# Altium PCB PCB1.PcbDoc
Units mm, origin at the board's own origin, x right, y up, seen from the top; angles counter-clockwise.
Board outline 40 x 20 mm, 2 copper layers (Top Layer, Bottom Layer); 19 components, 18 nets, 76 pads, 19 vias.
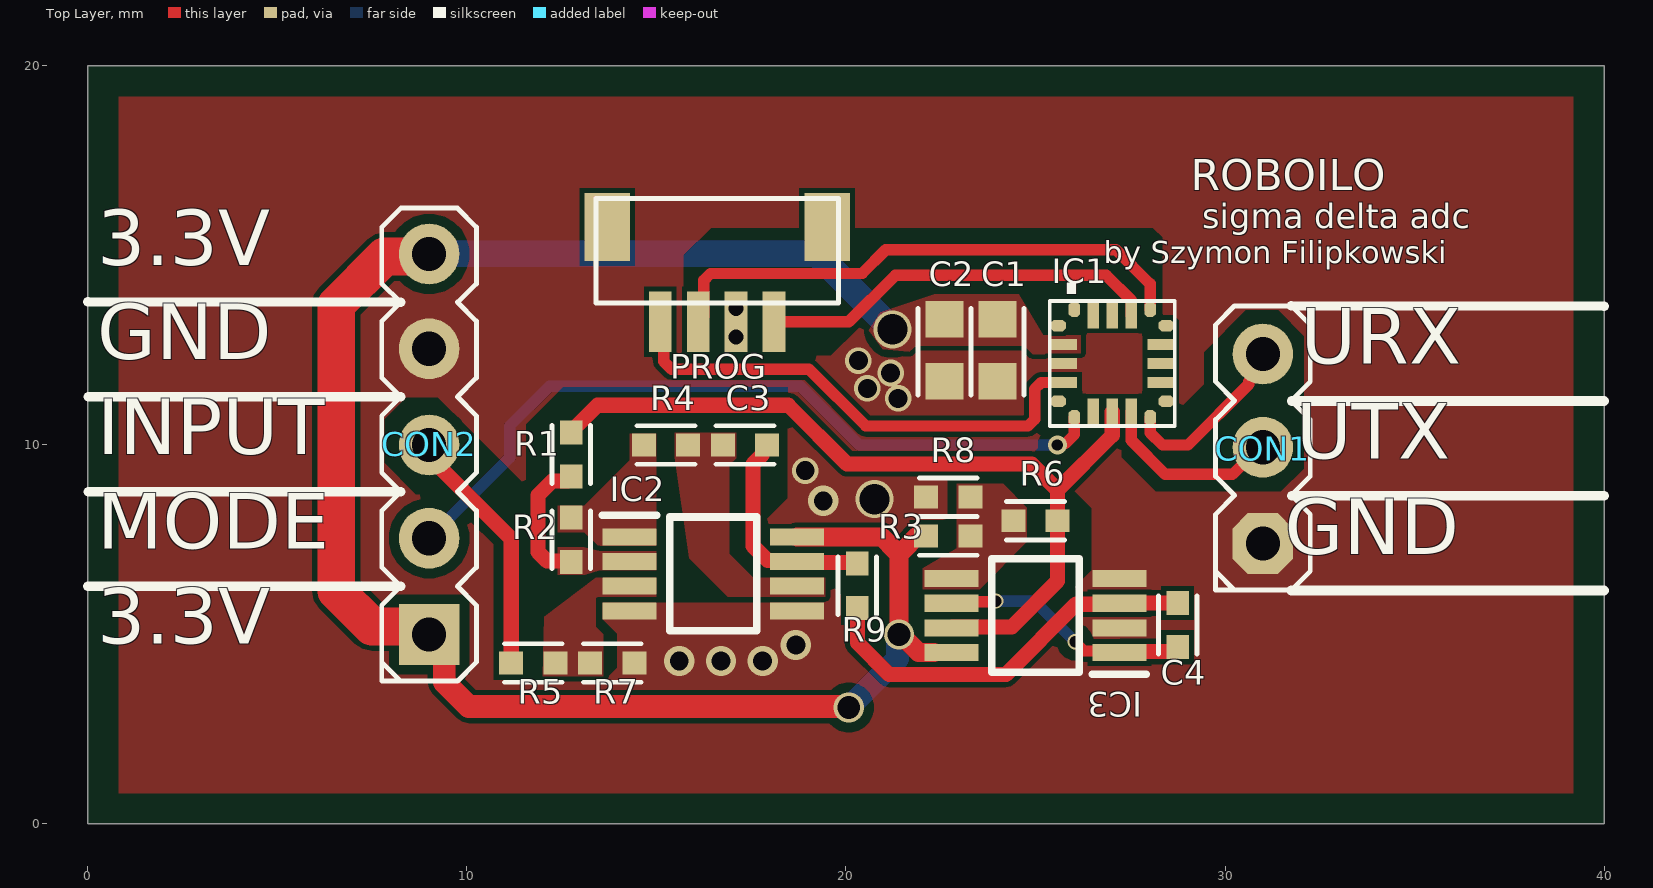
[diagram p0: Top Layer view]
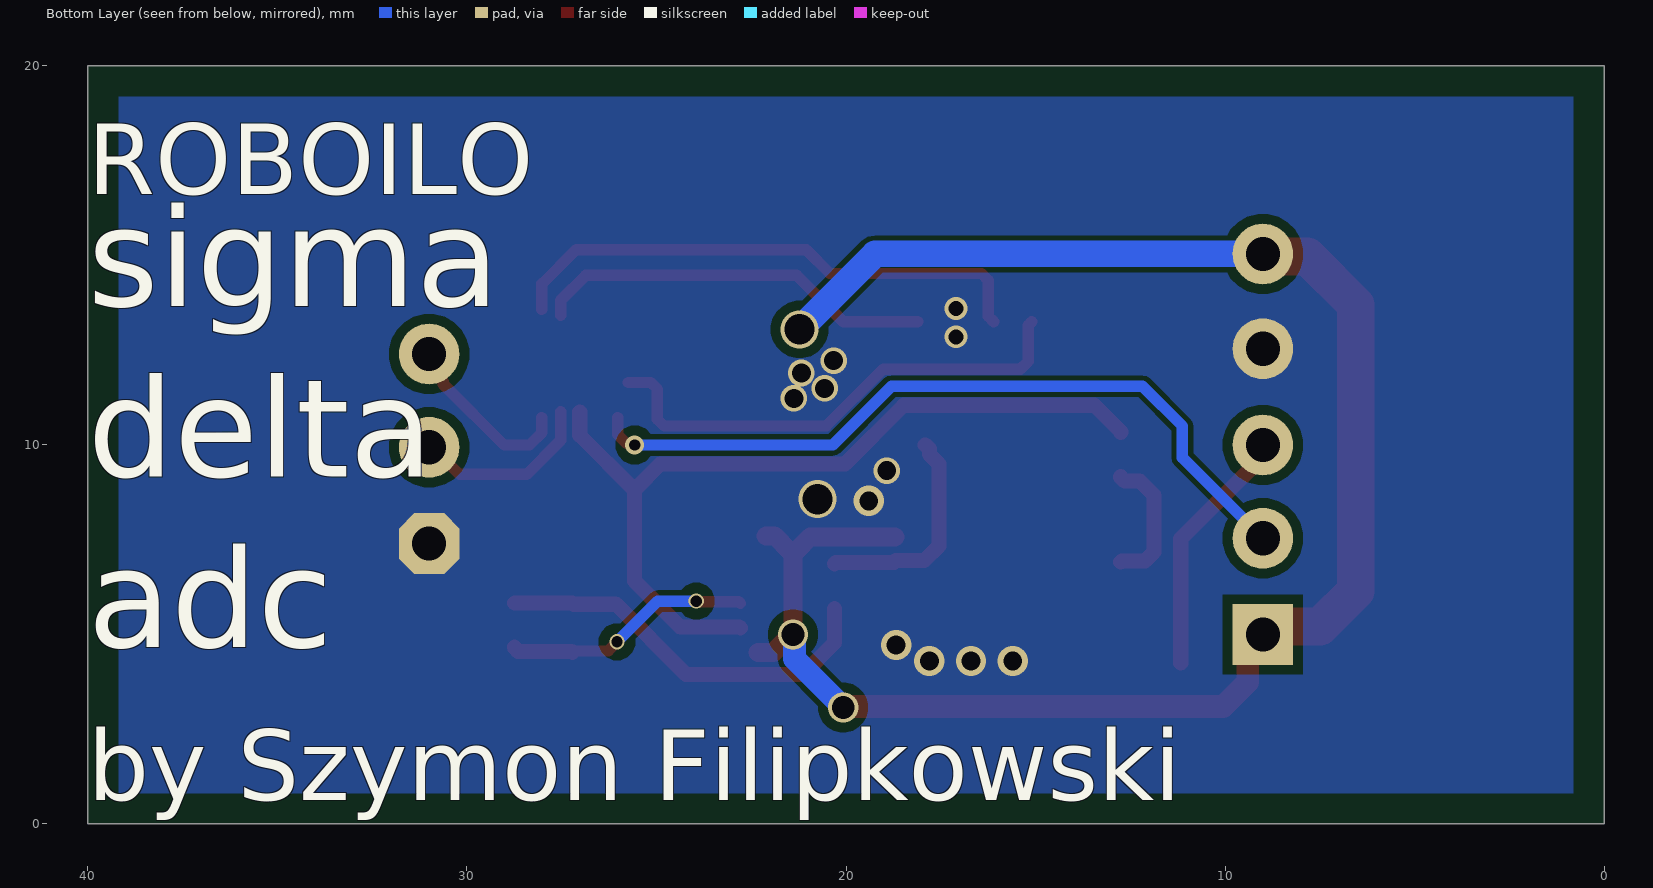
[diagram p1: Bottom Layer view, seen from below]
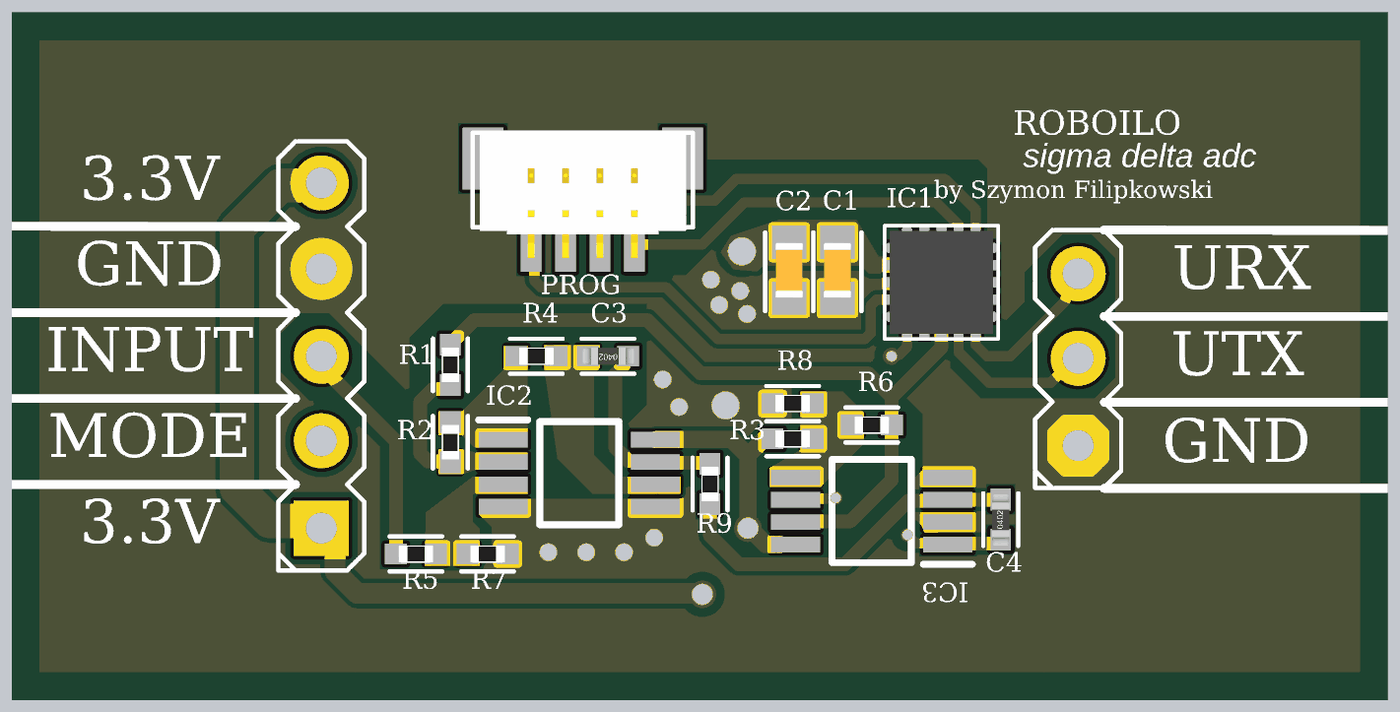
[diagram p2: 3D render of the assembled board from above, using the file's embedded part models]

## Layer stack, top to bottom
Top Solder: solder mask 0.0102, Solder Resist, Dk 3.5
Top Layer: signal copper 0.0356
Dielectric 1: dielectric 0.32, FR-4, Dk 4.8
Bottom Layer: signal copper 0.0356
Bottom Solder: solder mask 0.0102, Solder Resist, Dk 3.5

## Board outline
0,0 40,0 40,20 0,20

## Design rules (kind name [scope] priority, off if disabled: settings)
BoardOutlineClearance [All] p1: gap=0.8 ignorepadtopadclearanceinfootprint=FALSE
Clearance [All] p1: gap=0.127 ignorepadtopadclearanceinfootprint=TRUE except(0.2: Arc-THPad Track-THPad SMDPad-THPad; 0.254: THPad-Fill THPad-Poly THPad-Region Via-Fill Via-Poly Via-Region; 0.33: Arc-Hole Track-Hole SMDPad-Hole THPad-Hole Via-Hole Fill-Hole Poly-Hole Region-Hole; 0.5: THPad-THPad)
HoleSize [All] p1: absolutevalues=TRUE maxlimit=4 minlimit=0.02 maxpercent=80.000 minpercent=20.000
HoleToHoleClearance [All] p1: gap=0.127 allowstackedmicrovias=TRUE
PlaneClearance [All] p1: clearance=0.3
PlaneConnect PlaneConnect_1 [(HasFootprint('R 2512'))] p1: planeconnectstyle=Relief reliefexpansion=0.508 reliefentries=4 reliefconductorwidth=0.254 reliefairgap=0.254
PlaneConnect [All] p2: planeconnectstyle=Relief reliefexpansion=0.508 reliefentries=4 reliefconductorwidth=0.254 reliefairgap=0.254
PolygonConnect "Polygon Power Connection" [(HasFootprint('DFN 5x6')) OR  (HasFootprint('R 2512')) OR  IsVia OR  HasFootprint('SMD PAD')  OR  (HasFootprint('DJNR60454R5FERROCORE'))  OR  (HasFootprint ('SON50P200X200X80-9N-D')) OR (HasFootprint('SOT230P700X180-4N'))  OR    InNetClass('Power')] p1: connectstyle=Direct reliefconductorwidth=0.254 reliefentries=4 polygonreliefangle="90 Angle" airgapwidth=0.254 // Conection to high power components
PolygonConnect [All] p2: connectstyle=Direct reliefconductorwidth=0.254 reliefentries=4 polygonreliefangle="90 Angle" airgapwidth=0.254
RoutingVias [All] p1: holewidth=0.3 width=0.5 viastyle="Through Hole" minholewidth=0.2 minwidth=0.3 maxholewidth=1 maxwidth=1.27
SilkToSilkClearance [All] p1: silktosilkclearance=0.127
SolderMaskExpansion "Tented Vias" [IsVia] p1: expansion=0.102 istentingtop=TRUE
SolderMaskExpansion [All] p2: expansion=0.102 istentingtop=FALSE
Width [All] p1: maxlimit=1 minlimit=0.127 preferedwidth=0.3 minimp=50.000000 maximp=50.000000 favimp=50.000000
25 further rules are at their usual default settings.

## Classes and differential pairs
component class main: C1 C2 CON1 CON2 IC1 PROG
component class adc: C3 C4 IC2 IC3 R1 R2 R3 R4 R5 R6 R7 R8 R9

## Components (designator, comment, footprint, x,y, rotation, side; value= is the part's Value field where it differs from the comment)
C1 "100nF" "C 0603" 24,12.5 r270 top
C2 "4.7uF" "C 0603" 22.6,12.5 r270 top
C3 "100nF" "C 0402" 17.334,10 r180 top locked
C4 "100nF" "C 0402" 28.75,5.25 r90 top locked
CON1 "3 Pin" "Goldpin 2.54MM 3P" 31,9.94 r90 top
CON2 "5 PIN" "Goldpin 2.54mm 5P" 9,10 r90 top locked
IC1 "STM32C011F4U6TR" "UFQFPN20 - byMe" 25.375,10.5 r0 top
IC2 "TLV2462CDGKR" SOP65P490X110-8N 16.5,6.6 r0 top locked
IC3 "TLV2462CDGKR" SOP65P490X110-8N 25,5.5 r180 top locked
PROG "4 PIN" BM04B-SRSS-TB 16.6,14.75 r0 top locked
R1 "10k" "R 0402" 12.75,9.75 r90 top locked
R2 "10k" "R 0402" 12.75,7.5 r270 top
R3 "100k" "R 0402" 22.7,7.6 r0 top
R4 "2k1" "R 0402" 15.25,10 r180 top locked
R5 "100k" "R 0402" 11.75,4.25 r180 top locked
R6 "100k" "R 0402" 25,8 r0 top locked
R7 "100k" "R 0402" 13.834,4.25 r0 top locked
R8 "100k" "R 0402" 22.7,8.625 r180 top
R9 "2k1" "R 0402" 20.3,6.284 r90 top

## Footprints (in the part's own frame and the unit in brackets; to place one, negate y for a bottom-side part, rotate by r counter-clockwise, add the part's x,y. Pads: shape width x height; smd on the part's side, far side on the other; paste and mask are expansions set on the pad)
BM04B-SRSS-TB [mm]
  rect 0.6x1.6 smd: 1(-1.5,-1.5) 2(-0.5,-1.5) 3(0.5,-1.5) 4(1.5,-1.5)
  rect 1.2x1.8 smd: A(-2.9,1) B(2.9,1)
  silkscreen extent -3.2,-1 3.2,1.75, body extent -3,-1.9 3,1.7, height 4.25
"C 0402" [mm] "MLCC Capacitor 0402"
  rect 0.635x0.6 smd: 1(-0.584,0) 2(0.584,0)
  silkscreen extent -0.76,-0.51 0.76,0.51, body extent -0.76,-0.25 0.74,0.25, height 0.35
"C 0603" [mil]
  rect 38x39.37 smd: 1(-32,0) 2(32,0)
  silkscreen extent -43,-28 47,28, body extent -31,-16 31,16, height 24
"Goldpin 2.54MM 3P" [mm]
  oct 1.6x1.6 hole 0.9: 1(-2.54,0)
  round 1.6 hole 0.9: 2(0,0) 3(2.46,0)
  silkscreen extent -3.77,-1.25 3.73,1.25
"Goldpin 2.54mm 5P" [mm]
  rect 1.6x1.6 hole 0.9: 1(-5,0)
  round 1.6 hole 0.9: 2(-2.46,0) 3(0,0) 4(2.54,0) 5(5.04,0)
  silkscreen extent -6.23,-1.25 6.25,1.25
"R 0402" [mm] "0402 resistor Chip"
  rect 0.635x0.6 smd: 1(-0.584,0) 2(0.584,0)
  silkscreen extent -0.76,-0.51 0.76,0.51, body extent -0.5,-0.25 0.5,0.25, height 0.31
SOP65P490X110-8N [mm]
  rect 1.425x0.45 smd: 1(-2.212,0.975) 2(-2.212,0.325) 3(-2.212,-0.325) 4(-2.212,-0.975) 5(2.212,-0.975) 6(2.212,-0.325) 7(2.212,0.325) 8(2.212,0.975)
  silkscreen extent -2.93,-1.5 1.15,1.55, body extent -2.45,-1.5 2.45,1.5, height 1.1
"UFQFPN20 - byMe" [mm]
  oct 0.4x0.3 smd: 1(0.225,2.65) 5(0.225,0.65) 11(3.075,0.65) 15(3.075,2.65)
  rect 0.7x0.3 smd: 2(0.375,2.15) 3(0.375,1.65) 4(0.375,1.15) 12(2.925,1.15) 13(2.925,1.65) 14(2.925,2.15)
  oct 0.3x0.4 smd: 6(0.65,0.225) 10(2.65,0.225) 16(2.65,3.075) 20(0.65,3.075)
  rect 0.3x0.7 smd: 7(1.15,0.375) 8(1.65,0.375) 9(2.15,0.375) 17(2.15,2.925) 18(1.65,2.925) 19(1.15,2.925)
  silkscreen extent 0,0 3.3,3.3, body extent 0.14,0.14 3.16,3.16, height 0.55

## Part data
C1 C2 C3 C4: library part Capacitor, "MLCC Capacitor"
IC2 IC3: "Integrated Circuit", Manufacturer_Name="Texas Instruments", Mouser Part Number=595-TLV2462CDGKR, Arrow Part Number=TLV2462CDGKR, Arrow Price/Stock=https://www.arrow.com/en/products/tlv2462cdgkr/texas-instruments?region=nac, Datasheet Link=http://www.ti.com/lit/gpn/TLV2462, Height=1.1mm, Manufacturer_Part_Number=TLV2462CDGKR, Mouser Price/Stock=https://www.mouser.co.uk/ProductDetail/Texas-Instruments/TLV2462CDGKR?qs=Fg5TsMy7H4uE1B0PPHeSQQ%3D%3D
R1 R2 R3 R4 R5 R6 R7 R8 R9: library part Resistor, "General pourpouse resistor"
IC1: ComponentLink1Description=Datasheet, ComponentLink1URL=https://www.alldatasheet.com/datasheet-pdf/download/1583958/STMICROELECTRONICS/STM32C011F4U6TR.html

## Via types
v1: diameter 0.7, hole 0.5, Top Layer to Bottom Layer, tented both sides, 5 vias
v2: diameter 0.8, hole 0.5, Top Layer to Bottom Layer, tented both sides, 5 vias
v3: diameter 0.6, hole 0.4, Top Layer to Bottom Layer, 2 vias
v4: diameter 1, hole 0.8, Top Layer to Bottom Layer, tented both sides, 2 vias
v5: diameter 0.8, hole 0.6, Top Layer to Bottom Layer, tented both sides, 2 vias
v6: diameter 0.4, hole 0.3, Top Layer to Bottom Layer, 2 vias
v7: diameter 0.5, hole 0.3, Top Layer to Bottom Layer, tented both sides, 1 vias

## Nets (pads, with @x,y where several pads share a name; then routed paths per layer and width w, separated by ;. In a path a pad name is that pad's centre, name@x,y a point inside that pad or via, vN(x,y) a via of type N, cw(c..) or ccw(c..) an arc to the next point about the centre after c; other vN are vias at no path point)
3.3V: C1.1 C2.1 CON2.1 CON2.5 IC1.2 IC2.8 IC3.8 R3.1 | length 48.4
  Top Layer w0.5: IC2.8 20.944,7.575 21.319,7.2 21.4,7.2 ; R3.1 21.881,7.6 21.481,7.2 21.4,7.2 ; IC3.8@22.326,4.525 21.918,4.525 21.443,5 v5(21.4,5) 21.4,7.2
  Top Layer w0.6: CON2.1 9.4,4.6 9.4,3.749 10.049,3.1 20.05,3.1 v5(20.075,3.075)
  Top Layer w1: CON2.1 8.789,5.211 7.489,5.211 6.55,6.15 6.55,13.7 7.819,14.969 8.929,14.969 CON2.5
  Bottom Layer w0.6: v5(20.075,3.075) 21.362,4.362 v5@21.362,4.962
  Bottom Layer w0.7: CON2.5 19.235,15.04 v4(21.225,13.05)
A_NEG_IN_1: IC2.2 R1.1 R2.2 | length 3.6
  Top Layer w0.4: R2.2 12.725,6.941 12.109,6.941 11.875,7.175 11.875,8.675 12.248,9.048 12.65,9.048 12.75,9.148 R1.1
A_NEG_IN_2: C3.2 IC2.6 R4.1
A_OUT_1: IC2.1 R2.1 R4.2
A_OUT_2: C3.1 IC2.7 R9.2 | length 5.8
  Top Layer w0.4: C3.1 17.901,10 17.801,9.9 17.801,9.748 17.55,9.497 17.55,7.337 17.937,6.95 18.687,6.95 18.737,6.9 20.268,6.9 R9.2
A_POS_IN_1: IC2.3 R5.1 R7.1
ANALOG_IN: CON2.3 R5.2 | length 6.6
  Top Layer w0.4: CON2.3 9,9.7 11.166,7.534 R5.2
B_NEG_IN_2: C4.1 IC3.1 IC3.6 | length 6.6
  Top Layer w0.3: IC3.6 22.824,5.861 23.931,5.861 v6(23.95,5.88) ; v6@26.041,4.799 26.277,4.564 27.173,4.564 IC3.1
  Top Layer w0.4: IC3.1 27.237,4.55 28.65,4.55 28.75,4.65 C4.1
  Bottom Layer w0.3: v6(23.95,5.88) 24.968,5.88 v6(26.041,4.807)
B_OUT_2: IC1.8 IC3.7 R1.2 R6.2 | length 22.4
  Top Layer w0.4: R1.2 12.75,10.352 13.446,11.048 18.477,11.048 20.025,9.5 24.9,9.5 25.584,8.816 ; IC3.7 22.813,5.2 24.375,5.2 25.584,6.409 R6.2 25.584,8.816 ; IC1.8 27.025,10.257 25.584,8.816
B_POS_IN_1: C4.2 IC3.3 R9.1 | length 10.5
  Top Layer w0.4: R9.1@20.3,5.682 20.3,4.782 21.134,3.948 24.221,3.948 26.073,5.8 27.187,5.8 27.217,5.83 28.745,5.83 C4.2
B_POS_IN_2: IC3.5 R3.2 R6.1 R8.1
GND: C1.2 C2.2 CON1.1 CON2.4 IC1.3 IC2.4 IC2.5 IC3.2 IC3.4 PROG.3 R7.2 R8.2
  other v1: 18.925,9.325 21.375,11.23 20.566,11.491 21.175,11.9 20.325,12.225
  other v2: 15.6,4.3 16.7,4.3 17.8,4.3 18.677,4.724 19.4,8.525
  other v3: 17.1,12.853 17.1,13.6
  other v4: 20.75,8.57
MODE_SELECT: CON2.2 IC1.6 | length 20.4
  Top Layer w0.3: v7(25.575,10) 25.613,10.038 25.788,10.038 26.025,10.276 IC1.6
  Bottom Layer w0.3: CON2.2 11.125,9.665 11.125,10.499 12.176,11.55 18.8,11.55 20.35,10 v7(25.575,10)
RESET: IC1.4 PROG.1 | length 13.3
  Top Layer w0.3: PROG.1 15.193,13.157 15.193,12.207 15.4,12 19.025,12 20.525,10.5 24.8,10.5 24.975,10.676 24.975,11.474 25.151,11.65 IC1.4
SWCLK: IC1.17 PROG.4 | length 10.6
  Top Layer w0.3: PROG.4 20.075,13.25 21.3,14.475 26.867,14.475 27.525,13.817 IC1.17
SWDIO: IC1.16 PROG.2 | length 14.3
  Top Layer w0.3: PROG.2 16.25,13.4 16.25,14.349 16.426,14.525 20.425,14.525 21.05,15.15 27.125,15.15 28.025,14.25 IC1.16
UART_RX: CON1.3 IC1.10 | length 4.8
  Top Layer w0.3: IC1.10 28.025,10.325 28.35,10 29.025,10 30.629,11.604 30.629,11.677 31,12.048 CON1.3
UART_TX: CON1.2 IC1.9 | length 4.9
  Top Layer w0.3: IC1.9 27.525,10.125 28.425,9.225 30.196,9.225 30.911,9.94 CON1.2
pads on no net: IC1.1 IC1.5 IC1.7 IC1.11 IC1.12 IC1.13 IC1.14 IC1.15 IC1.18 IC1.19 IC1.20 PROG.A PROG.B

## Polygon pours and split planes (outlines as drawn)
GND on Top Layer "GND_L01_P031" (solid, pour order 31): 0,19.975 0.025,20 40,20 40,0 0,0
3.3V on Top Layer "3.3V_L01_P028" (solid, pour order 28): 24.924,12.4 24.699,12.625 21.85,12.625 21.675,12.462 20.975,12.525 20.6,13.025 20.9,13.5 22.325,13.975 24.555,13.975 25.2,12.9 26.2,12.9 26.2,12.375
A_NEG_IN_2 on Top Layer "A_NEG_IN_2_L01_P006" (solid, pour order 6): 17.1,9.65 16.925,9.475 16.925,7.125 17.55,6.5 19.45,6.5 19.45,6 16.875,6 15.865,7.01 15.475,9.675 15.475,10.325 17.1,10.325
A_POS_IN_1 on Top Layer "A_POS_IN_1_L01_P000" (solid, pour order 0): 12,3.9 13.6,3.9 13.6,5 13.4,5.2 13.4,5.95 13.45,6 15,6 15,6.5 13.4,6.5 12.037,5.462
B_POS_IN_2 on Top Layer "B_POS_IN_2_L01_P010" (solid, pour order 10): 22.925,8.975 22.925,7.275 22.025,6.75 22.025,6.2 23.525,6.2 24.775,7.45 24.775,8.35 24.15,8.975 23.625,8.975
A_NEG_IN_1 on Top Layer "A_NEG_IN_1_L01_P001" (solid, pour order 1): 15,6.7 13.5,6.7 13.125,6.575 12.4,6.575 12.4,7.3 13.1,7.3 13.5,7.2 15,7.2
A_OUT_1 on Top Layer "A_OUT_1_L01_P003" (solid, pour order 3): 13.5,7.3 15,7.3 15,10.3 14.3,10.3 14.3,9.6 13.1,8.4 12.4,8.4 12.4,7.7 13.1,7.7
GND on Bottom Layer "GND_L02_P029" (solid, pour order 29): 0,20 40,20 40,0 0,0

## Other copper
Top Layer:
  pour cut-out: 27.275,12.975 27.85,12.975 28.35,13.475 28.35,15.475 28.1,15.725 16.45,15.725 15.725,15 15.725,12.375 16.725,12.375 16.7,12.4 16.7,14.15 17.5,14.15 17.5,12.35 19.6,12.35 21.325,14.075 26.925,14.075 27.275,13.725
  pour cut-out: 27.275,11.325 27.275,9.675 28.175,8.775 31.475,8.775 32.075,9.375 32.075,12.875 31.4,13.55 30.55,13.55 29.45,12.45 29.45,11.6 28.775,10.925 28.175,10.925 27.775,11.325
  pour cut-out: 11.562,10.55 12.538,11.525 18.462,11.525 18.462,8.6 17.787,7.925 17.837,7.875 17.837,7.25 19.387,7.25 19.412,7.225 19.412,5.85 14.987,5.85 14.987,6.6 12.962,6.6 11.562,5.2
  pour cut-out: 19.525,7.225 19.9,7.225 20.925,6.2 21.8,6.2 21.8,5.325 20.6,5.325 19.525,6.4 19.525,6.538
  pour cut-out: 24.55,4.775 26.475,6.7 26.475,8.325 25.05,9.75 22.675,9.75 22.675,7.55 22.425,7.3 22.25,7.3 21.8,6.85 21.8,4.925 21.95,4.775
  pour cut-out: 7.825,9.525 8.65,8.7 9.375,8.7 10.7,7.375 10.7,3.8 13.625,3.8 13.95,4.125 13.95,5.025 13.575,5.4 13.575,5.85 15.1,5.85 15.1,6.6 13.075,6.6 11.675,5.2 11.675,8.8 9.225,11.25 8.4,11.25 7.825,10.675

## Silkscreen, mask and mechanical layers (free items; w line width, h text height)
Top Overlay:
  lines w0.254: 0,6.27 8.25,6.27 ; 0,13.78 8.25,13.77 ; 0.01,8.77 8.25,8.77 ; 0.01,11.27 8.25,11.27 ; 31.75,6.16 40,6.16 ; 31.75,13.67 40,13.66 ; 31.76,8.66 40,8.66 ; 31.76,11.16 40,11.16
  text "." at 1.8,17.674 h10
  text "ROBOILO" at 29.1,16.444 h1.4
  text "sigma delta adc" at 29.397,15.504 h1.1
  text "by Szymon Filipkowski" at 26.8,14.6 h1
  text "3.3V" at 0.25,14.25 h2.5
  text "GND" at 0.25,11.77 h2.5
  text "URX" at 32,11.66 h2.5
  text "INPUT" at 0.25,9.27 h2.5
  text "UTX" at 31.875,9.15 h2.5
  text "MODE" at 0.25,6.77 h2.5
  text "GND" at 31.575,6.625 h2.5
  text "3.3V" at 0.25,4.27 h2.5
Bottom Overlay:
  text "ROBOILO" at 40,16 h3.2
  text "sigma  / delta  / adc" at 40,3.8 h4.5
  text "by Szymon Filipkowski" at 40,0 h3.2